# EAGLE board esp32 m5 shield (EAGLE 9.6.2)
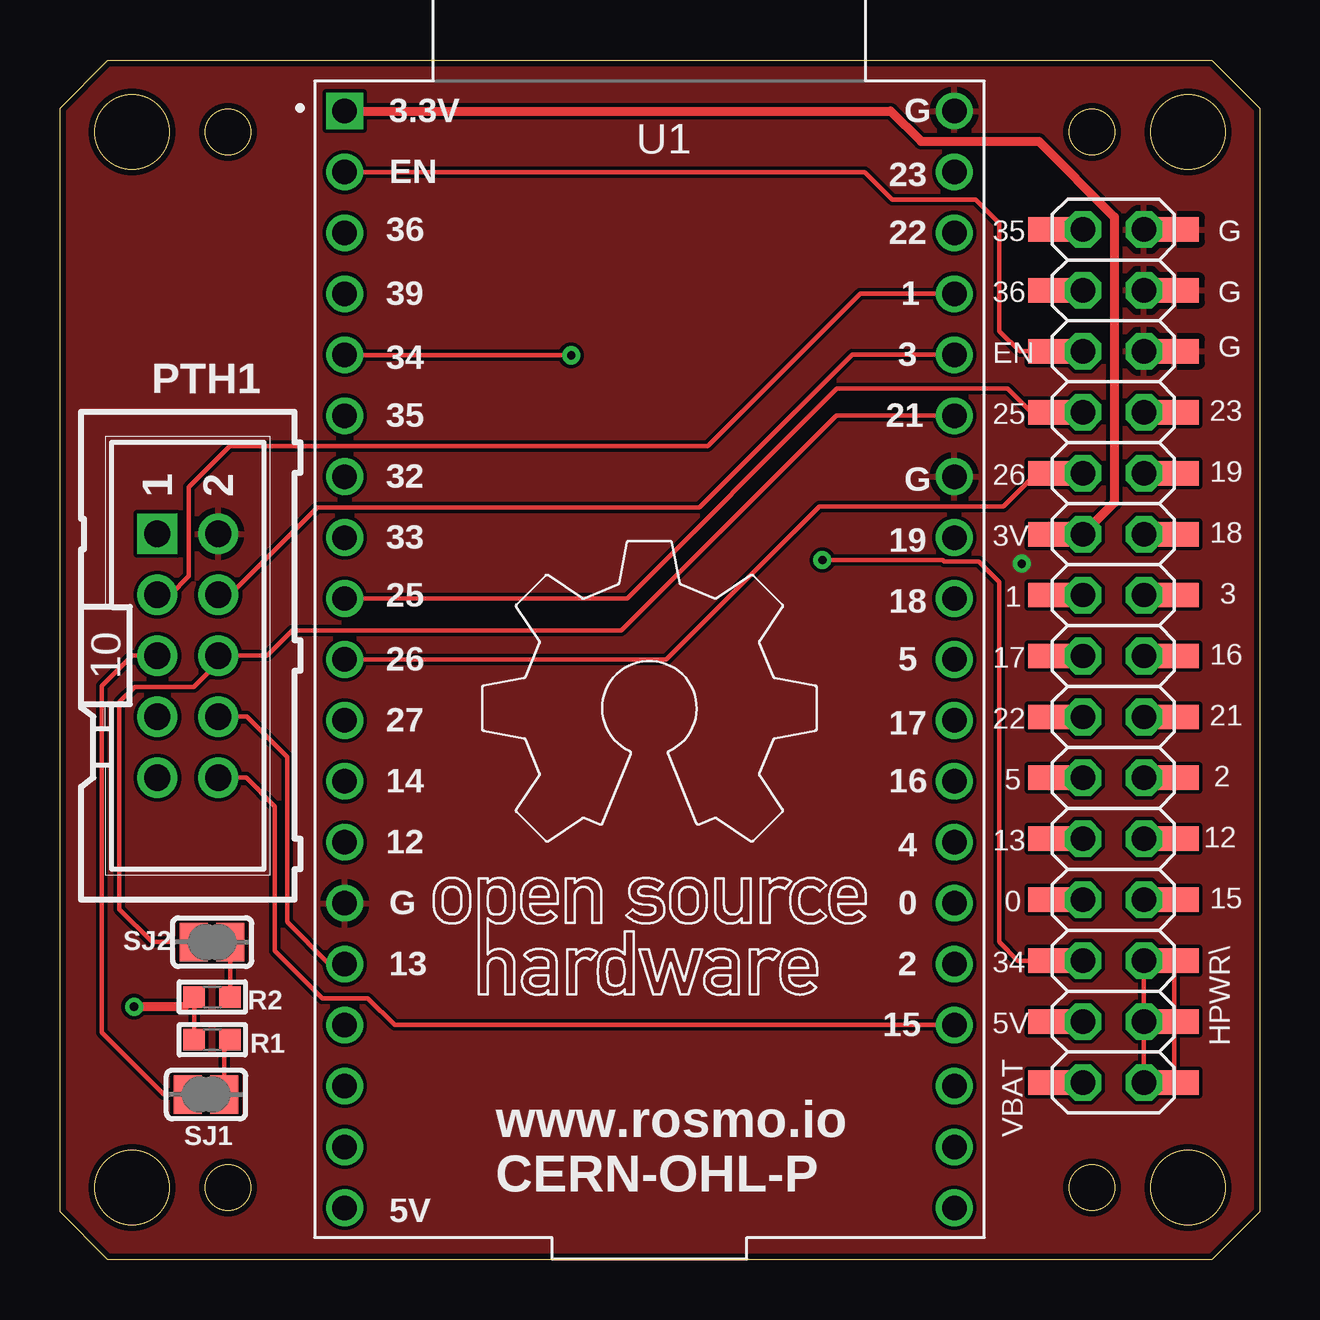
[diagram p0: board, top side]
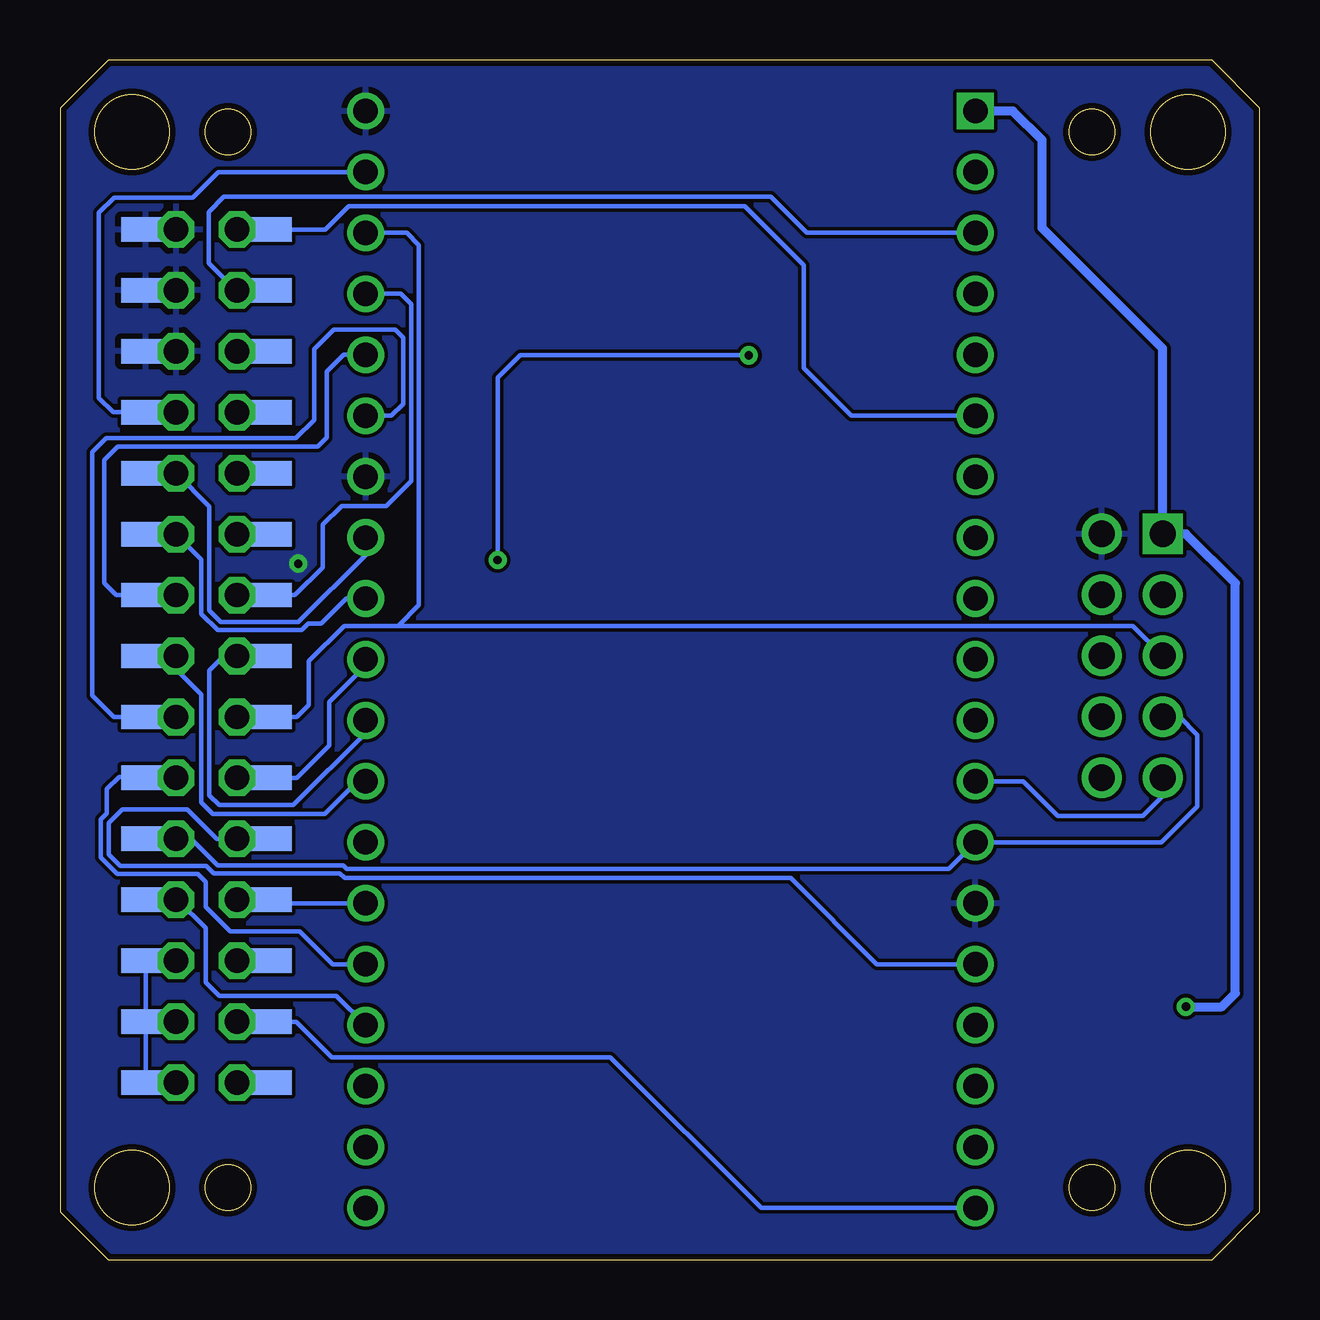
[diagram p1: board, bottom side, seen from below]

Size 50 x 50 mm. Coordinates in mm from the lower left corner, seen from the top.
Outline: 48,50 50,48 50,2 48,0 2,0 0,2 0,48 2,50 48,50
Outline: circle at 43,47 radius 0.95
Outline: circle at 47,47 radius 1.55
Outline: circle at 43,3 radius 0.95
Outline: circle at 47,3 radius 1.55
Outline: circle at 7,47 radius 0.95
Outline: circle at 3,47 radius 1.55
Outline: circle at 7,3 radius 0.95
Outline: circle at 3,3 radius 1.55
Copper layers (1*16): Top 0.035mm / dielectric 1.5mm / Bottom 0.035mm
Design rules "default *": minimum track width 6mil, minimum drill 0.35mm, track to track 6mil, track to pad 6mil, pad to pad 6mil, via to via 6mil, smd to smd 0mil, copper to edge 10mil, drill to drill 6mil, minimum pad ring 10mil, minimum via ring 8mil, stop-mask expansion 4mil, vias tented up to drill 0mil, thermal gap 10mil

## Footprints (pad centres in the part's own frame; a part is rotated, then mirrored left to right if it is on the bottom)
2X15 = drill 1.016 octagon: 1 -17.78,-1.27; 2 -17.78,1.27; 3 -15.24,-1.27; 4 -15.24,1.27; 5 -12.7,-1.27; 6 -12.7,1.27; 7 -10.16,-1.27; 8 -10.16,1.27; 9 -7.62,-1.27; 10 -7.62,1.27; 11 -5.08,-1.27; 12 -5.08,1.27; 13 -2.54,-1.27; 14 -2.54,1.27; 15 0,-1.27; 16 0,1.27; 17 2.54,-1.27; 18 2.54,1.27; 19 5.08,-1.27; 20 5.08,1.27; 21 7.62,-1.27; 22 7.62,1.27; 23 10.16,-1.27; 24 10.16,1.27; 25 12.7,-1.27; 26 12.7,1.27; 27 15.24,-1.27; 28 15.24,1.27; 29 17.78,-1.27; 30 17.78,1.27 | smd 1.016 x 2.032: P$1 -17.78,-2.54; P$2 -17.78,2.54; P$3 -15.24,-2.54; P$4 -15.24,2.54; P$5 -12.7,-2.54; P$6 -12.7,2.54; P$7 -10.16,-2.54; P$8 -10.16,2.54; P$9 -7.62,-2.54; P$10 -7.62,2.54; P$11 -5.08,-2.54; P$12 -5.08,2.54; P$13 -2.54,-2.54; P$14 -2.54,2.54; P$15 0,-2.54; P$16 0,2.54; P$17 2.54,-2.54; P$18 2.54,2.54; P$19 5.08,-2.54; P$20 5.08,2.54; P$21 7.62,-2.54; P$22 7.62,2.54; P$23 10.16,-2.54; P$24 10.16,2.54; P$25 12.7,-2.54; P$26 12.7,2.54; P$27 15.24,-2.54; P$28 15.24,2.54; P$29 17.78,-2.54; P$30 17.78,2.54 | smd 1.016 x 2.032 bottom: P$31 -17.78,-2.54; P$32 -17.78,2.54; P$33 -15.24,-2.54; P$34 -15.24,2.54; P$35 -12.7,-2.54; P$36 -12.7,2.54; P$37 -10.16,-2.54; P$38 -10.16,2.54; P$39 -7.62,-2.54; P$40 -7.62,2.54; P$41 -5.08,-2.54; P$42 -5.08,2.54; P$43 -2.54,-2.54; P$44 -2.54,2.54; P$45 0,-2.54; P$46 0,2.54; P$47 2.54,-2.54; P$48 2.54,2.54; P$49 5.08,-2.54; P$50 5.08,2.54; P$51 7.62,-2.54; P$52 7.62,2.54; P$53 10.16,-2.54; P$54 10.16,2.54; P$55 12.7,-2.54; P$56 12.7,2.54; P$57 15.24,-2.54; P$58 15.24,2.54; P$59 17.78,-2.54; P$60 17.78,2.54
ML10-MALE = drill 1.1 pad 1.676 square: 1 -5.08,-1.27 | drill 1.1 pad 1.676: 2 -5.08,1.27; 3 -2.54,-1.27; 4 -2.54,1.27; 5 0,-1.27; 6 0,1.27; 7 2.54,-1.27; 8 2.54,1.27; 9 5.08,-1.27; 10 5.08,1.27
0603-MINI = smd 0.9 x 0.9: 1 -0.75,0; 2 0.75,0
SOLDERJUMPER_CLOSEDWIRE = smd 1.168 x 1.6: 1 -0.762,0; 2 0.762,0 | smd 0.635 x 0.203: WIRE 0,0
MODULE_ESP32-DEVKITC = drill 1.02 square: 1 -12.7,22.85 | drill 1.02: 2 -12.7,20.31; 3 -12.7,17.77; 4 -12.7,15.23; 5 -12.7,12.69; 6 -12.7,10.15; 7 -12.7,7.61; 8 -12.7,5.07; 9 -12.7,2.53; 10 -12.7,-0.01; 11 -12.7,-2.55; 12 -12.7,-5.09; 13 -12.7,-7.63; 14 -12.7,-10.17; 15 -12.7,-12.71; 16 -12.7,-15.25; 17 -12.7,-17.79; 18 -12.7,-20.33; 19 -12.7,-22.87; 20 12.7,-22.87; 21 12.7,-20.33; 22 12.7,-17.79; 23 12.7,-15.25; 24 12.7,-12.71; 25 12.7,-10.17; 26 12.7,-7.63; 27 12.7,-5.09; 28 12.7,-2.55; 29 12.7,-0.01; 30 12.7,2.53; 31 12.7,5.07; 32 12.7,7.61; 33 12.7,10.15; 34 12.7,12.69; 35 12.7,15.23; 36 12.7,17.77; 37 12.7,20.31; 38 12.7,22.85

## Placement (x,y rotation side)
JP1  [2X15]  43.89,25.16 270 top
PTH1  [ML10-MALE]  5.32,25.17 270 top
R1  4.7k  [0603-MINI]  6.34,9.17 180 top
R2  4.7k  [0603-MINI]  6.34,10.95 180 top
SJ1  Do not place  [SOLDERJUMPER_CLOSEDWIRE]  6.09,6.88 0 top
SJ2  Do not place  [SOLDERJUMPER_CLOSEDWIRE]  6.34,13.23 0 top
U1  ESP32-DEVKITC  [MODULE_ESP32-DEVKITC]  24.56,25.02 0 top

## Library data of the parts
JP1 = pinhead
PTH1 = UEXT
R1 R2 SJ1 SJ2 = microbuilder
U1 = ESP32-DEVKITC; AVAILABILITY: In Stock; DESCRIPTION: ESP32-WROVER-IE series Transceiver; 802.11 b/g/n (Wi-Fi, WiFi, WLAN), Bluetooth® Smart Ready 4.x Dual Mode Evaluation Board; MF: Espressif Systems; MP: ESP32-DEVKITC; PACKAGE: None; PRICE: None; PURCHASE-URL: https://pricing.snapeda.com/search/part/ESP32-DEVKITC/?ref=eda

## Nets
0: JP1.23 JP1.P$23 JP1.P$53 U1.25
1: JP1.13 JP1.P$13 JP1.P$43 PTH1.3 U1.35
2: JP1.20 JP1.P$20 JP1.P$50 U1.24
3: JP1.14 JP1.P$14 JP1.P$44 PTH1.4 U1.34
3.3V: JP1.11 JP1.P$11 JP1.P$41 PTH1.1 R1.2 R2.2 U1.1
5: JP1.19 JP1.P$19 JP1.P$49 U1.29
5.0V: JP1.27 JP1.P$27 JP1.P$57 U1.19
12: JP1.22 JP1.P$22 JP1.P$52 PTH1.7 U1.13
13: JP1.21 JP1.P$21 JP1.P$51 PTH1.8 U1.15
14: PTH1.9 U1.12
15: JP1.24 JP1.P$24 JP1.P$54 PTH1.10 U1.23
16: JP1.16 JP1.P$16 JP1.P$46 U1.27
17: JP1.15 JP1.P$15 JP1.P$45 U1.28
18: JP1.12 JP1.P$12 JP1.P$42 U1.30
19: JP1.10 JP1.P$10 JP1.P$40 U1.31
21: JP1.18 JP1.P$18 JP1.P$48 PTH1.6 SJ2.1 U1.33
22: JP1.17 JP1.P$17 JP1.P$47 PTH1.5 SJ1.1 U1.36
23: JP1.8 JP1.P$8 JP1.P$38 U1.37
25: JP1.7 JP1.P$7 JP1.P$37 U1.9
26: JP1.9 JP1.P$9 JP1.P$39 U1.10
34: JP1.25 JP1.P$25 JP1.P$55 U1.5
35: JP1.1 JP1.P$1 JP1.P$31 U1.6
36: JP1.3 JP1.P$3 JP1.P$33 U1.3
EN: JP1.5 JP1.P$5 JP1.P$35 U1.2
GND: JP1.2 JP1.4 JP1.6 JP1.P$2 JP1.P$4 JP1.P$6 JP1.P$32 JP1.P$34 JP1.P$36 PTH1.2 U1.14 U1.32 U1.38
HPWR: JP1.26 JP1.28 JP1.30 JP1.P$26 JP1.P$28 JP1.P$30 JP1.P$56 JP1.P$58 JP1.P$60
N$1: R1.1 SJ1.2
N$2: R2.1 SJ2.2
N$13: U1.26
N$20: U1.22
N$21: U1.21
N$22: U1.20
N$25: U1.16
N$26: U1.17
N$27: U1.18
N$30: U1.11
N$36: U1.7
N$37: U1.8
N$43: U1.4
VBAT: JP1.29 JP1.P$29 JP1.P$59

## Tracks (layer width: path | path; a pad name or v marks a point on that pad's centre or on a via)
0
  Top 0.178: JP1.23 JP1.P$53
  Bottom 0.178: U1.25 42.48,14.85 JP1.23 JP1.P$53
1
  Top 0.178: U1.35 33.34,40.25 26.99,33.91 7.08,33.91 5.37,32.21 5.37,28.5 4.59,27.71 PTH1.3 | JP1.13 JP1.P$43
  Bottom 0.178: U1.35 35.8,40.25 35.37,39.83 35.37,32.46 36.41,31.42 38.27,31.42 39.05,30.63 39.05,28.85 40.21,27.7 JP1.P$43 JP1.13
2
  Top 0.178: JP1.P$50 JP1.20
  Bottom 0.178: U1.24 38.64,12.31 40.02,13.69 42.92,13.69 43.93,14.71 43.93,15.75 44.26,16.08 47.62,16.08 48.3,16.75 48.3,18.35 48.05,18.6 48.05,19.61 47.54,20.12 46.47,20.12 JP1.P$50 JP1.20
3
  Top 0.178: U1.34 33.01,37.71 26.63,31.34 10.71,31.34 7.08,27.71 PTH1.4 | JP1.P$44 JP1.14
  Bottom 0.178: U1.34 38.17,37.71 38.88,37.01 38.88,34.26 39.26,33.88 47.59,33.88 48.15,33.32 48.15,28.19 47.65,27.7 JP1.P$44 JP1.14
3.3V  (via drill 0.35)
  Top 0.178: R2.2 R1.2 | JP1.P$41 JP1.11
  Top 0.381: R2.2 5.18,10.54 v3.09,10.54 | U1.1 34.61,47.87 35.88,46.61 40.78,46.61 43.93,43.46 43.93,31.55 JP1.11
  Bottom 0.178: JP1.P$41 JP1.11
  Bottom 0.381: U1.1 10.3,47.87 9.08,46.66 9.08,43 4.05,37.97 PTH1.1 3.09,30.25 1.03,28.19 1.03,11.1 1.59,10.54 v3.09,10.54
5
  Top 0.178: JP1.19 JP1.P$49
  Bottom 0.178: U1.29 37.26,24.75 38.78,23.24 38.78,21.44 40.13,20.08 JP1.P$49 JP1.19
5.0V
  Top 0.178: JP1.27 JP1.P$57
  Bottom 0.178: U1.19 20.79,2.15 27.07,8.43 38.67,8.43 40.16,9.92 JP1.P$57 JP1.27
12
  Top 0.178: JP1.P$52 JP1.22
  Bottom 0.178: PTH1.7 3.37,22.63 2.61,21.87 2.61,18.9 4.11,17.39 U1.13 12.98,16.28 38.05,16.28 38.21,16.43 43.42,16.43 44.53,17.54 JP1.22 JP1.P$52
13
  Top 0.178: U1.15 11.22,12.31 9.46,14.07 9.46,20.95 7.79,22.63 PTH1.8 | JP1.P$51 JP1.21
  Bottom 0.178: U1.15 15.96,12.31 19.55,15.9 38.14,15.9 38.34,16.1 43.6,16.1 43.91,16.41 47.49,16.41 47.97,16.89 47.97,18.21 47.41,18.77 44.69,18.77 43.46,17.54 JP1.21 JP1.P$51
14
  Bottom 0.178: U1.12 9.87,19.93 8.42,18.49 4.89,18.49 4.05,19.33 PTH1.9
15
  Top 0.178: U1.23 13.94,9.77 12.82,10.9 10.94,10.9 8.96,12.88 8.96,18.9 7.76,20.09 PTH1.10 | JP1.P$54 JP1.24
  Bottom 0.178: U1.23 38.48,11 43.37,11 43.93,11.56 43.93,13.82 45.11,15 JP1.24 JP1.P$54
16
  Top 0.178: JP1.P$46 JP1.16
  Bottom 0.178: U1.27 37.61,19.93 38.98,18.57 43.63,18.57 44.11,19.05 44.11,23.54 45.16,24.6 45.16,25.12 | 45.16,25.12 JP1.16 | JP1.P$46 45.2,25.16 45.16,25.12
17
  Top 0.178: JP1.P$45 JP1.15
  Bottom 0.178: U1.28 37.26,21.96 40.27,18.95 43.37,18.95 43.78,19.35 43.78,24.56 43.18,25.16 JP1.15 JP1.P$45
18
  Top 0.178: JP1.P$42 JP1.12
  Bottom 0.178: U1.30 38.07,27.55 39.11,26.52 39.65,26.52 39.93,26.24 43.43,26.24 44.11,26.91 44.11,29.18 JP1.12 JP1.P$42
19
  Top 0.178: JP1.10 JP1.P$40
  Bottom 0.178: U1.31 37.26,29.38 40.07,26.57 43.3,26.57 43.78,27.05 43.78,31.39 JP1.10 JP1.P$40
21
  Top 0.178: SJ2.1 3.85,13.23 2.48,14.6 2.48,23.24 3.11,23.88 5.58,23.88 6.59,24.89 PTH1.6 8.63,25.17 9.67,26.21 23.38,26.21 32.35,35.17 U1.33 | JP1.P$48 JP1.18
  Bottom 0.178: U1.33 36.19,35.17 35.7,35.66 35.7,38.43 36.03,38.76 38.6,38.76 39.41,37.95 39.41,35 40.17,34.24 48.07,34.24 48.66,33.65 48.66,23.52 47.75,22.62 JP1.P$48 JP1.18
22
  Top 0.178: SJ1.1 4.33,6.88 1.74,9.47 1.74,23.9 3.01,25.17 PTH1.5 | JP1.P$47 JP1.17
  Bottom 0.178: U1.36 35.55,42.79 35.04,42.29 35.04,27.28 35.91,26.42 | 35.91,26.42 38.17,26.42 39.64,24.94 39.64,23.11 40.13,22.62 JP1.P$47 JP1.17 | PTH1.5 5.3,26.42 35.91,26.42
23
  Top 0.178: JP1.8 JP1.P$38
  Bottom 0.178: U1.37 43.4,45.33 44.46,44.27 47.74,44.27 48.38,43.64 48.38,35.91 47.78,35.32 JP1.P$38 JP1.8
25
  Top 0.178: U1.9 23.63,27.55 32.37,36.3 39.49,36.3 40.46,35.32 JP1.P$37 JP1.7
  Bottom 0.178: JP1.P$37 JP1.7
26
  Top 0.178: U1.10 25.26,25.01 31.64,31.39 39.31,31.39 40.69,32.78 JP1.P$39 JP1.9
  Bottom 0.178: JP1.9 JP1.P$39
34  (via drill 0.35)
  Top 0.178: U1.5 11.88,37.69 v21.3,37.69 | v31.76,29.16 36.77,29.16 36.84,29.09 38.29,29.09 39.13,28.24 39.13,13.23 39.9,12.46 JP1.P$55 JP1.25
  Bottom 0.178: v31.76,29.16 31.76,36.75 30.83,37.69 v21.3,37.69 | JP1.P$55 JP1.25
35
  Top 0.178: JP1.P$31 JP1.1
  Bottom 0.178: U1.6 17.03,35.17 19.01,37.16 19.01,41.45 21.48,43.92 37.96,43.92 38.94,42.94 JP1.P$31 JP1.1
36
  Top 0.178: JP1.P$33 JP1.3
  Bottom 0.178: U1.3 18.88,42.79 20.39,44.3 43.17,44.3 43.8,43.66 43.8,41.53 42.67,40.4 JP1.3 JP1.P$33
EN
  Top 0.178: U1.2 33.52,45.33 34.69,44.17 38.17,44.17 39.13,43.2 39.13,38.71 39.98,37.86 JP1.P$35 JP1.5
  Bottom 0.178: JP1.5 JP1.P$35
GND  (via drill 0.35)
  other vias: 40.07,29.01
  pour Top: -0.01,50.32 50.03,50.32 50.03,-0.48 -0.01,-0.48
  pour Bottom: -0.26,50.32 -0.26,-0.48 49.77,-0.48 49.77,50.32
HPWR
  Top 0.178: JP1.P$56 | JP1.P$56 JP1.P$58 JP1.P$60 | JP1.30 JP1.28 JP1.26 45.18,12.45 JP1.P$56
  Bottom 0.178: JP1.P$58 JP1.P$56 JP1.26 | JP1.P$58 JP1.P$60 JP1.30 | JP1.P$58 JP1.28
N$1
  Top 0.178: SJ1.2 6.85,8.93 R1.1
N$2
  Top 0.178: R2.1 7.09,13.22 SJ2.2
VBAT
  Top 0.178: JP1.29 JP1.P$59
  Bottom 0.178: JP1.29 JP1.P$59

## Text on the board
tPlace: 3.3V | G | EN | 23 | 36 | 35 | G | 22 | 39 | 1 | 36 | G | G | 34 | 3 | EN | 23 | 35 | 21 | 25 | 19 | 32 | G | 26 | 18 | 33 | 19 | 3V | 3 | 25 | 18 | 1 | 16 | 26 | 5 | 17 | 21 | 27 | 17 | 22 | 2 | 14 | 16 | 5 | 12 | 12 | 4 | 13 | 15 | G | 0 | 0 | 13 | 2 | 34 | 5V | 15 | HPWR\ | VBAT | www.rosmo.io / CERN-OHL-P | 5V